# EAGLE board PCB-SSB-2x2LK (EAGLE 6.2)
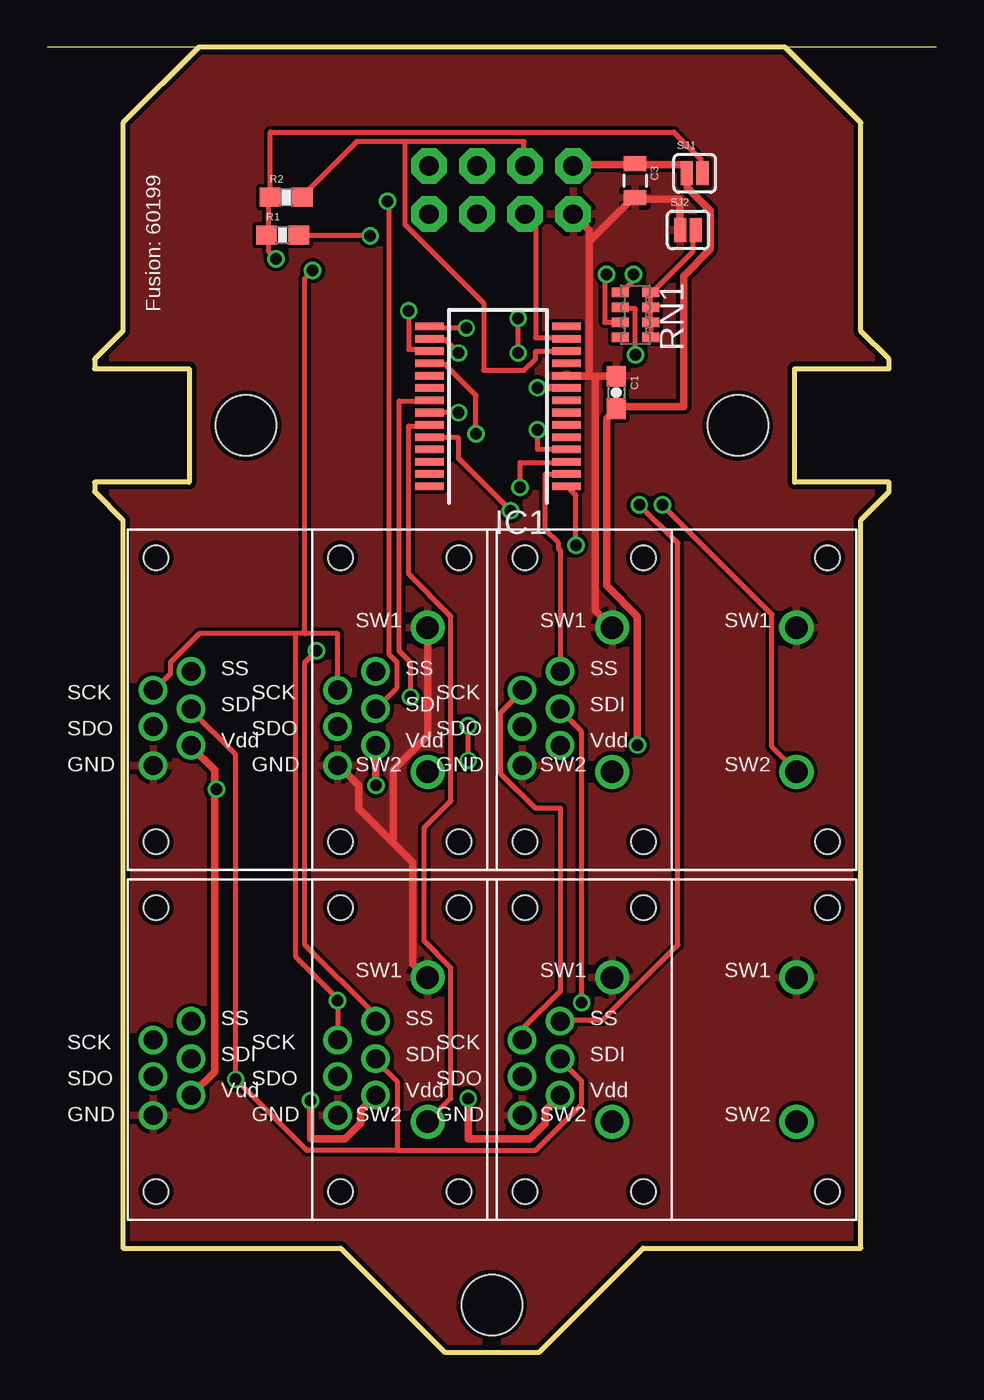
[diagram p0: board, top side]
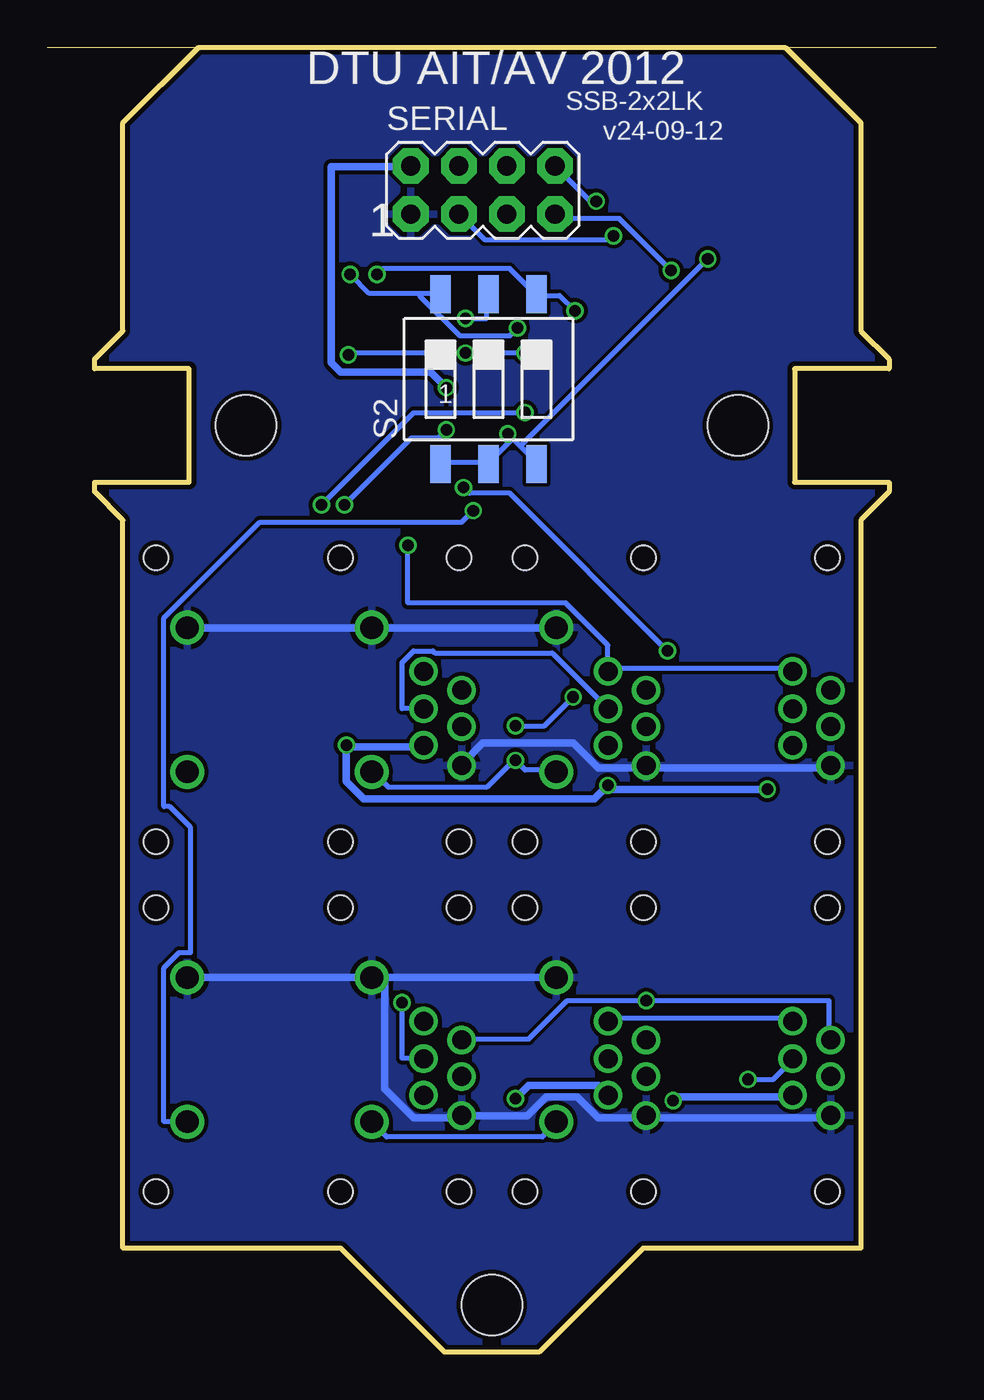
[diagram p1: board, bottom side, seen from below]

Size 47 x 69 mm. Coordinates in mm from the lower left corner, seen from the top.
Outline: 47,69 0,69
Outline: 7.5,52 7.5,46 2.5,46 2.5,45.5 4,44 4,5.5 15.5,5.5 21,0 26,0 31.5,5.5 43,5.5 43,44 44.5,45.5 44.5,46 39.5,46 39.5,52 44.5,52 44.5,52.5 43,54 43,65 39,69 8,69 4,65 4,54 2.5,52.5 2.5,52 7.5,52
Copper layers (1*16): Top 0.035mm / dielectric 1.5mm / Bottom 0.035mm
Design rules: minimum track width 6mil, minimum drill 12mil, track to track 6mil, track to pad 6mil, pad to pad 6mil, via to via 6mil, smd to smd 0mil, copper to edge 10mil, drill to drill 10mil, minimum pad ring 10mil, minimum via ring 6mil, stop-mask expansion 2mil, vias tented up to drill 100mil, thermal gap 10mil
Net classes: 0 default: width 0.203 mm, drill 0.406 mm, clearance 0.203 mm; 1 Power: width 0.406 mm, drill 0.61 mm, clearance 0.203 mm
Holes 3.2 mm at 23.5,2.5 10.5,49 36.5,49

## Footprints (pad centres in the part's own frame; a part is rotated, then mirrored left to right if it is on the bottom)
0603-CAP = smd 1.1 x 1: 1 -0.85,0; 2 0.85,0
0805 = smd 0.8 x 1.2: 1 -0.9,0; 2 0.9,0
SSOP28 = smd 0.4 x 1.5: 1 -4.225,-3.625; 2 -3.575,-3.625; 3 -2.925,-3.625; 4 -2.275,-3.625; 5 -1.625,-3.625; 6 -0.975,-3.625; 7 -0.325,-3.625; 8 0.325,-3.625; 9 0.975,-3.625; 10 1.625,-3.625; 11 2.275,-3.625; 12 2.925,-3.625; 13 3.575,-3.625; 14 4.225,-3.625; 15 4.225,3.625; 16 3.575,3.625; 17 2.925,3.625; 18 2.275,3.625; 19 1.625,3.625; 20 0.975,3.625; 21 0.325,3.625; 22 -0.325,3.625; 23 -0.975,3.625; 24 -1.625,3.625; 25 -2.275,3.625; 26 -2.925,3.625; 27 -3.575,3.625; 28 -4.225,3.625
0603-RES = smd 1.1 x 1: 1 -0.85,0; 2 0.85,0
CAY16_HAND = smd 0.5 x 0.904: 1 -1.2,-0.813; 2 -0.4,-0.813; 3 0.4,-0.813; 4 1.2,-0.813; 5 1.2,0.813; 6 0.4,0.813; 7 -0.4,0.813; 8 -1.2,0.813
SMS-003 = smd 1.092 x 2.007: 1 -2.54,-4.496; 2 0,-4.496; 3 2.54,-4.496; 4 2.54,4.496; 5 0,4.496; 6 -2.54,4.496
2X4 = drill 1.016 pad 1.88 octagon: 1 -3.81,-1.27; 2 -3.81,1.27; 3 -1.27,-1.27; 4 -1.27,1.27; 5 1.27,-1.27; 6 1.27,1.27; 7 3.81,-1.27; 8 3.81,1.27
SJ_2S = smd 0.635 x 1.27: 1 -0.412,0; 2 0.412,0
SMART_SWITCH = drill 1.2: 1 6.35,3.81; 2 6.35,-3.81 | drill 1: 3 -8.153,-3.48; 4 -6.147,-2.413; 5 -8.153,-1.422; 6 -6.147,-0.483; 7 -8.153,0.508; 8 -6.147,1.499 | hole 1.3: -8.001,7.506; 8.001,7.506; 8.001,-7.506; -8.001,-7.506

## Placement (x,y rotation side)
C1  100nF  [0603-CAP]  30.07,50.75 270 top
C3  10uF  [0805]  31.07,61.94 270 top
IC1  MCP23017SS  [SSOP28]  23.82,50.01 90 top
R1  10K  [0603-RES]  12.44,59.07 0 top
R2  10K  [0603-RES]  12.63,61.07 0 top
RN1  10K  [CAY16_HAND]  31.09,54.85 90 top
S2  SWS003  [SMS-003]  23.68,51.45 0 bottom
SERIAL  M04X2  [2X4]  23.98,61.45 0 bottom
SJ1  SOLDERJUMPERNC  [SJ_2S]  34.22,62.34 0 top
SJ2  SOLDERJUMPERNC  [SJ_2S]  33.87,59.34 0 top
U$2  SMART_SWITCHSMART_SWITCH_8PIN  [SMART_SWITCH]  13.75,34.5 0 top
U$3  SMART_SWITCHSMART_SWITCH_8PIN  [SMART_SWITCH]  33.25,34.5 0 top
U$4  SMART_SWITCHSMART_SWITCH_8PIN  [SMART_SWITCH]  13.75,16 0 top
U$5  SMART_SWITCHSMART_SWITCH_8PIN  [SMART_SWITCH]  33.25,16 0 top
U$6  SMART_SWITCHSMART_SWITCH_8PIN  [SMART_SWITCH]  23.5,34.5 0 top
U$7  SMART_SWITCHSMART_SWITCH_8PIN  [SMART_SWITCH]  23.5,16 0 top

## Library data of the parts
C1 C3 R1 R2 SERIAL SJ1 SJ2 = SparkFun
IC1 = microchip; MF: MICROCHIP; MPN: MCP23017-E/SS; OC_FARNELL: 1467674; OC_NEWARK: 31K2960
RN1 = SKAARHOJ; OC_FARNELL: unknown; OC_NEWARK: unknown
S2 = smd-special
U$2-U$7 = SKAARHOJ

## Nets
5V [Power]: C1.2 C3.1 IC1.9 SERIAL.2 SJ1.1 U$2.4 U$3.4 U$4.4 U$5.4 U$6.4 U$7.4
5VL: IC1.18 R1.1 R2.1 S2.1 S2.2 S2.3 SJ1.2
A0: IC1.15 RN1.5 S2.6
A1: IC1.16 RN1.6 S2.5
A2: IC1.17 RN1.7 S2.4
DISP_DATA_OUT: SERIAL.6
GND [Power]: C1.1 C3.2 IC1.10 SERIAL.1 SJ2.1 U$2.1 U$2.3 U$3.1 U$3.3 U$4.1 U$4.3 U$5.1 U$5.3 U$6.1 U$6.3 U$7.1 U$7.3
GNDL: RN1.1 RN1.2 RN1.3 RN1.4 SJ2.2
GPA0: IC1.21 U$2.2 U$6.2
GPA1: IC1.22 U$3.2
GPA2: IC1.23 U$4.2 U$7.2
GPA3: IC1.24 U$5.2
GPB0: IC1.1 U$2.8 U$6.8
GPB1: IC1.2 U$3.8
GPB2: IC1.3 U$4.8 U$7.8
GPB3: IC1.4 U$5.8
I2C_SCL: IC1.12 R2.2 SERIAL.4
I2C_SDA: IC1.13 R1.2 SERIAL.3
SDI_MOSI: SERIAL.8 U$2.6 U$3.6 U$4.6 U$5.6 U$6.6 U$7.6
SDI_SCLK: SERIAL.7 U$2.7 U$3.7 U$4.7 U$5.7 U$6.7 U$7.7
SLIDER_IN: SERIAL.5

## Tracks (layer width: path | path; a pad name or v marks a point on that pad's centre or on a via)
5V  (via drill 0.61)
  Top 0.406: v25.91,51 27.43,51 IC1.9 | SERIAL.2 27.84,62.79 30.89,62.79 C3.1 31.09,62.79 33.73,62.79 33.73,62.48 SJ1.1 33.83,62.28 33.83,61.57 35.05,60.35 35.05,58.32 33.63,56.9 33.63,49.99 30.07,49.99 C1.2 29.97,49.78 29.57,49.38 29.57,40.54 31.19,38.91 v31.19,32.11 | v17.37,29.97 17.37,32 U$6.4 | 8.84,29.77 8.84,30.79 7.62,32 U$2.4 | 8.84,29.77 8.84,14.83 7.62,13.61 U$4.4 | v13.92,13.31 13.92,11.28 15.75,11.28 16.56,12.09 16.56,12.8 17.27,13.51 U$7.4 | v22.25,13.41 22.25,11.28 25.5,11.28 26.31,12.09 26.31,12.8 27.03,13.51 U$5.4 | v8.94,29.77 8.84,29.77
  Bottom 0.406: v25.91,51 26.72,51.82 31.5,51.82 32,52.32 32,62.69 27.84,62.69 SERIAL.2 | 31.19,32 31.19,30.18 30.28,29.26 18.09,29.26 v17.37,29.97 17.17,29.77 v8.94,29.77 | 31.19,32 27.13,32 U$3.4 | v13.92,13.31 13.72,13.51 7.62,13.51 U$4.4 | v22.25,13.41 21.54,14.12 17.88,14.12 17.37,13.61 U$7.4 | v31.19,32.11 31.19,32
5VL  (via drill 0.61)
  Top 0.254: v22.66,48.56 22.66,50.6 21.13,52.12 21.13,52.22 20.22,52.22 IC1.18 | SJ1.2 34.54,62.38 34.54,63.09 33.12,64.52 11.79,64.52 11.79,61.16 R2.1 11.68,61.06 11.68,59.13 R1.1 11.68,59.03 11.68,58.22 v12.09,57.81
  Bottom 0.254: 22,47.9 21.13,47.04 S2.3 | 22,47.9 v22.66,48.56 22.45,48.26 23.67,47.04 S2.2 23.77,47.04 26.21,47.04 S2.1 | v12.09,57.81 22,47.9
A0  (via drill 0.61)
  Top 0.254: v30.99,57 30.99,56.69 30.38,56.08 RN1.5 | v22.15,54.15 20.22,54.15 IC1.15
  Bottom 0.254: v30.99,57 29.97,55.98 27.33,55.98 | 27.33,55.98 26.31,55.98 S2.6 | v22.15,54.15 22.55,53.75 25.2,53.75 27.33,55.88 27.33,55.98
A1  (via drill 0.61)
  Top 0.254: v31.09,52.73 31.09,55.17 30.38,55.17 RN1.6 | v21.74,52.83 21.03,53.54 20.22,53.54 IC1.16 | v24.89,52.83 v24.89,54.66
  Bottom 0.254: v31.09,52.73 30.99,52.83 v24.89,52.83 v21.74,52.83 | v24.89,54.66 23.77,54.66 23.77,55.88 S2.5
A2  (via drill 0.61)
  Top 0.254: v29.57,57 29.46,56.9 29.46,54.46 RN1.7 | v19.1,55.07 19.1,53.03 20.12,53.03 IC1.17
  Bottom 0.254: v29.57,57 29.26,57.3 22.55,57.3 21.23,55.98 S2.4 21.03,55.88 19.91,55.88 v19.1,55.07
GND
  Top 0.406: SJ2.1 33.43,59.44 33.43,60.96 31.09,60.96 C3.2 30.89,60.96 28.75,58.83 28.65,58.83 | 28.65,51.61 27.53,51.61 IC1.10 | 28.65,51.61 28.96,51.61 | 28.96,51.61 29.97,51.61 C1.1 | 28.65,58.83 28.65,59.33 27.84,60.15 SERIAL.1 | 28.65,58.83 28.65,51.61 | 28.96,51.61 28.96,39.22 29.77,38.41 U$6.1 | 18.19,27.03 19.3,25.91 19.3,20.52 20.02,19.81 U$4.1 | 18.19,27.03 16.46,28.75 16.46,29.97 15.44,30.99 U$6.3 | U$2.1 20.12,38.3 20.12,32.61 18.29,30.79 18.29,27.13 18.19,27.03
  Bottom 0.406: U$2.1 20.12,38.3 29.77,38.3 U$6.1 29.97,38.3 39.52,38.3 U$3.1 | U$2.3 5.69,30.99 5.79,30.89 15.24,30.89 15.34,30.99 U$6.3 15.44,30.89 17.88,30.89 19.2,32.21 23.98,32.21 25.09,31.09 U$3.3 | U$4.3 5.69,12.5 5.79,12.39 15.24,12.39 15.34,12.5 U$7.3 15.44,12.39 17.88,12.39 19,13.51 20.62,13.51 21.64,12.5 25.09,12.5 U$5.3 25.3,12.5 25.4,12.39 27.64,12.39 29.16,13.92 29.16,19.71 U$7.1 | U$4.1 20.12,19.81 29.77,19.81 U$7.1 | U$5.1 39.52,19.81 29.97,19.81 U$7.1
  pour Top: 0,0 0,69 47,69 47,0
  pour Bottom: 0,0 0,69 47,69 47,0
GNDL
  Top 0.254: RN1.1 31.9,53.75 31.9,54.36 RN1.2 31.9,54.56 31.9,55.17 RN1.3 31.9,55.37 31.9,55.98 RN1.4 32,56.08 34.14,58.22 34.14,59.23 34.24,59.33 SJ2.2
GPA0  (via drill 0.61)
  Top 0.254: v19.2,34.65 19.2,36.47 18.59,37.08 18.59,50.29 20.12,50.29 IC1.21 | v22.25,31.29 v22.25,33.12
  Bottom 0.254: v19.2,34.65 20.73,33.12 v22.25,33.12 | U$2.2 20.12,30.79 21.74,30.79 v22.25,31.29 22.35,31.29 23.77,29.87 28.96,29.87 29.77,30.68 U$6.2
GPA1  (via drill 0.61)
  Top 0.254: v21.74,49.68 20.22,49.68 IC1.22 | v32.51,44.81 38.3,39.01 38.3,32 39.52,30.79 U$3.2
  Bottom 0.254: v21.74,49.68 27.64,49.68 v32.51,44.81
GPA2
  Top 0.254: IC1.23 20.12,48.97 19.1,48.97 19.1,41.15 21.34,38.91 21.34,29.16 19.91,27.74 19.91,21.74 21.34,20.32 21.34,13.41 20.12,12.19 U$4.2
  Bottom 0.254: U$7.2 29.77,12.09 29.06,11.38 20.83,11.38 20.12,12.09 U$4.2
GPA3  (via drill 0.61)
  Top 0.254: v24.49,44.5 21.74,47.24 21.74,48.36 20.22,48.36 IC1.24
  Bottom 0.254: v24.49,44.5 25.09,43.89 35.76,43.89 40.84,38.81 40.84,28.85 40.54,28.85 39.42,27.74 39.42,21.13 40.03,21.13 40.84,20.32 40.84,12.19 39.62,12.19 U$5.2
GPB0  (via drill 0.61)
  Top 0.254: v27.94,42.67 27.94,45.31 27.53,45.72 IC1.1
  Bottom 0.254: v27.94,42.67 27.94,39.62 19.61,39.62 17.37,37.39 17.37,36.07 U$6.8 17.27,36.17 7.72,36.17 7.62,36.07 U$2.8
GPB1
  Top 0.254: IC1.2 27.43,46.43 26.31,46.43 26.31,43.48 27.03,42.77 27.03,42.47 27.13,42.37 27.13,36.07 U$3.8
GPB2  (via drill 0.61)
  Top 0.254: v24.99,45.72 24.99,47.04 27.43,47.04 IC1.3 | v14.22,37.08 13.61,36.47 13.61,21.54 17.27,17.88 17.27,17.58 U$7.8
  Bottom 0.254: v24.99,45.72 24.69,45.41 22.55,45.41 v14.22,37.08 | U$4.8 7.62,17.58 7.72,17.68 17.17,17.68 17.27,17.58 U$7.8
GPB3  (via drill 0.61)
  Top 0.254: v25.91,48.77 25.91,47.75 27.43,47.75 IC1.4 | v31.29,44.81 33.33,42.77 33.33,21.54 29.36,17.58 27.13,17.58 U$5.8
  Bottom 0.254: v25.91,48.77 26.31,48.36 27.74,48.36 v31.29,44.81
I2C_SCL
  Top 0.254: 18.9,64.01 25.2,64.01 25.2,62.79 SERIAL.4 | 18.9,64.01 16.36,64.01 13.51,61.16 R2.2 | 18.9,64.01 18.9,59.64 23.06,55.47 23.06,51.92 25.2,51.92 25.81,52.53 25.81,52.93 27.43,52.93 IC1.12
I2C_SDA  (via drill 0.61)
  Top 0.254: v17.07,59.03 13.31,59.03 R1.2 | IC1.13 27.43,53.65 25.81,53.65 25.81,59.64 25.3,60.15 SERIAL.3
  Bottom 0.254: v17.07,59.03 17.27,58.83 23.88,58.83 25.2,60.15 SERIAL.3
SDI_MOSI  (via drill 0.61)
  Top 0.254: v17.98,60.86 18.09,60.76 18.09,36.88 18.49,36.47 18.49,35.15 17.37,34.04 U$6.6 | 18.49,10.67 13.72,10.67 v9.96,14.43 9.96,31.6 7.62,33.93 U$2.6 | 18.49,10.67 18.49,14.33 17.37,15.44 U$7.6 | 18.49,10.67 25.81,10.67 28.25,13.11 28.25,14.33 27.13,15.44 U$5.6 | v28.25,18.49 28.25,32.82 27.13,33.93 U$3.6
  Bottom 0.254: U$6.6 17.37,34.04 20.32,36.98 26.52,36.98 26.62,37.08 27.64,37.08 28.25,36.47 28.25,34.04 27.13,34.04 U$3.6 | v17.98,60.86 18.29,60.86 20.12,62.69 SERIAL.8 | v9.96,14.43 8.64,14.43 7.62,15.44 U$4.6 | v28.25,18.49 28.25,15.54 27.13,15.54 U$5.6
SDI_SCLK  (via drill 0.61)
  Top 0.254: U$7.7 15.34,16.56 v15.34,18.59 15.34,18.69 13.11,20.93 13.11,38 | U$3.7 25.09,34.95 23.98,33.83 23.98,30.58 25.81,28.75 27.13,28.75 27.13,19.1 25.2,17.17 25.2,16.56 U$5.7 | 13.61,38 15.34,38 15.34,35.05 U$6.7 | 13.61,38 13.11,38 | 13.11,38 8.03,38 6.5,36.47 6.5,35.87 5.69,35.05 U$2.7 | v14.02,57.2 13.61,56.79 13.61,38
  Bottom 0.254: U$4.7 5.69,16.56 5.69,18.59 v15.34,18.59 19.51,18.59 21.54,16.56 25.09,16.56 U$5.7 | v14.02,57.2 16.76,59.94 19.91,59.94 20.12,60.15 SERIAL.7

## Text on the board
_tsilk: Fusion: 60199
_bsilk: DTU AIT/AV 2012 | SSB-2x2LK | v24-09-12 | 1